# Altium PCB Alt_BRD_UPS_3_3V.PcbDoc
Units mm, origin at the board's own origin, x right, y up, seen from the top; angles counter-clockwise.
Board outline 13.97 x 16.51 mm, 2 copper layers (Top Layer, Bottom Layer); 26 components, 14 nets, 66 pads, 10 vias.
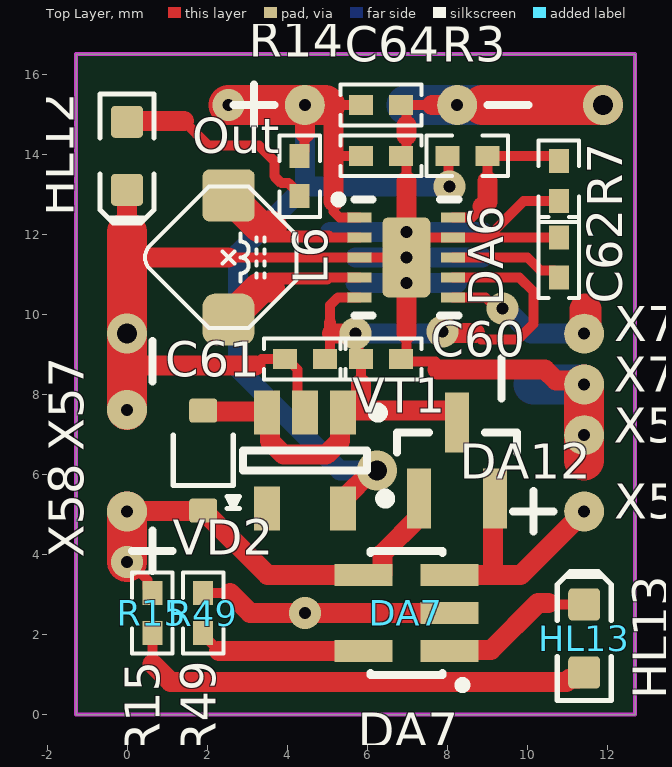
[diagram p0: Top Layer view]
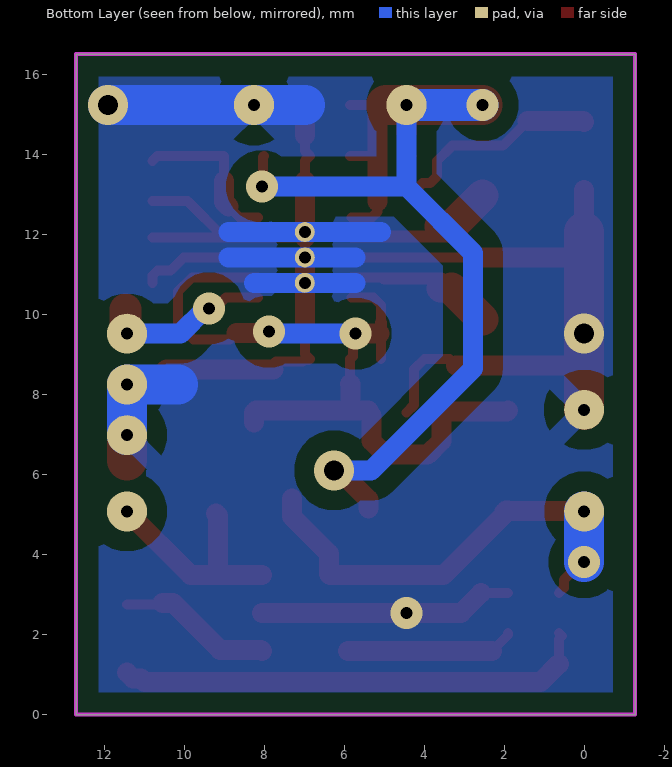
[diagram p1: Bottom Layer view, seen from below]
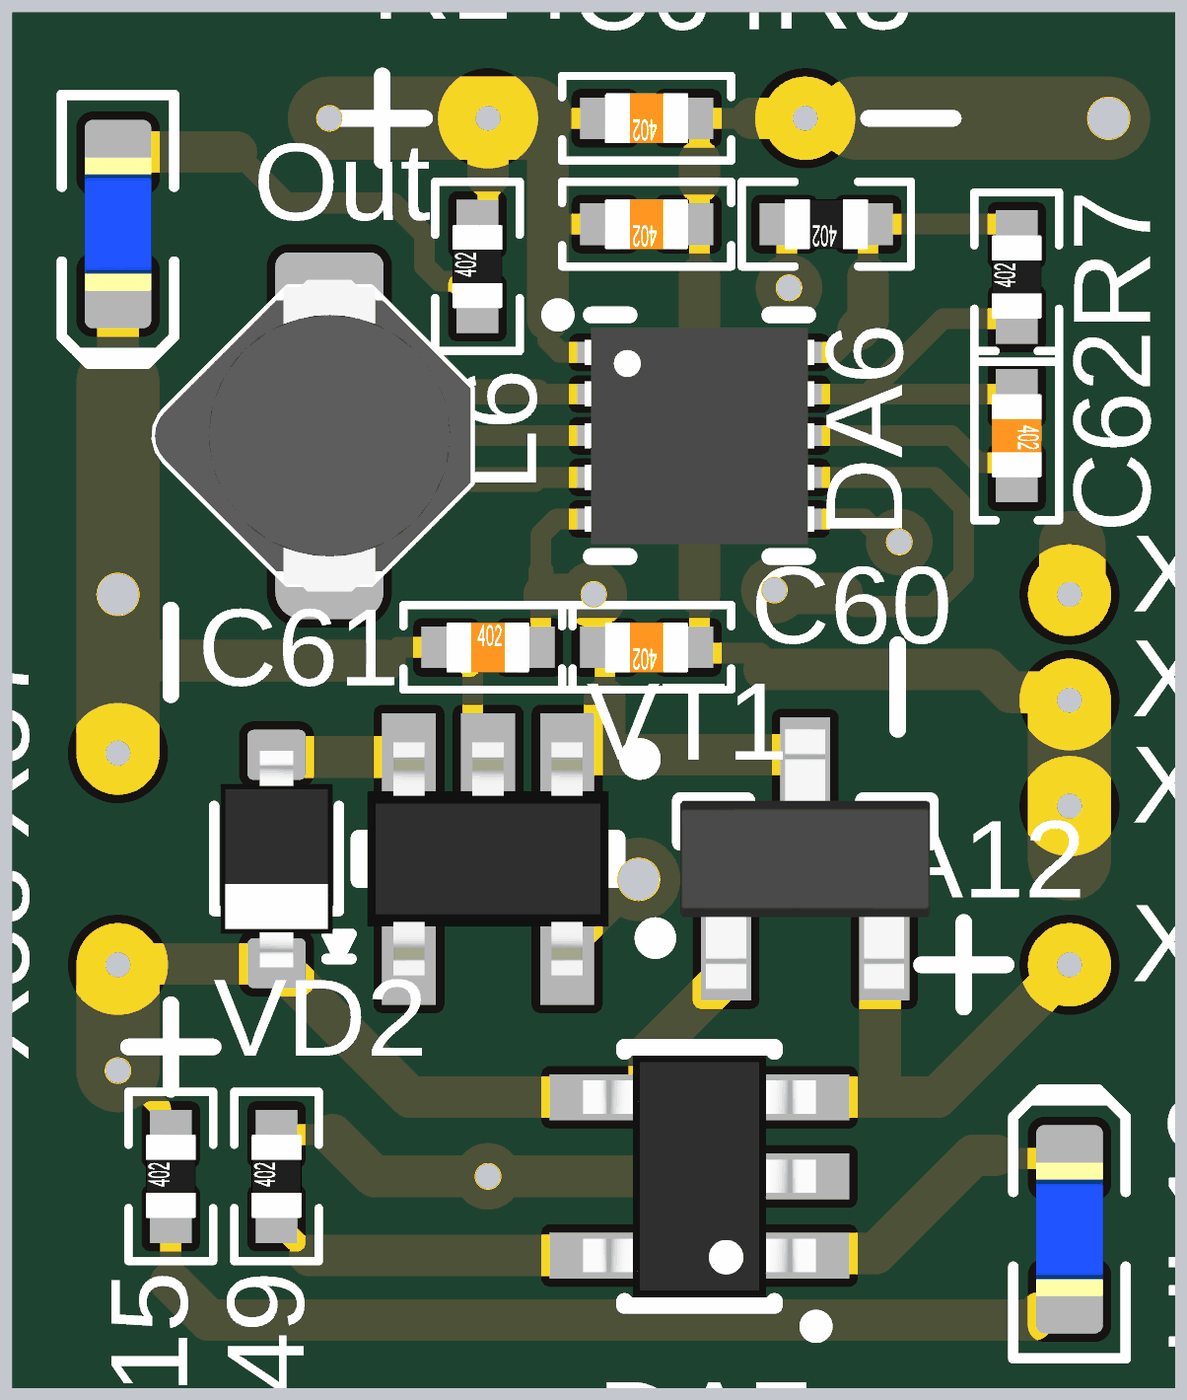
[diagram p2: 3D render of the assembled board from above, using the file's embedded part models]

## Layer stack, top to bottom
Top Solder: solder mask 0.0102, Solder Resist, Dk 3.5
Top Layer: signal copper 0.0356
Dielectric 1: dielectric 0.32, FR-4, Dk 4.8
Bottom Layer: signal copper 0.0356
Bottom Solder: solder mask 0.0102, Solder Resist, Dk 3.5

## Board outline
-1.27,0 -1.27,16.51 12.7,16.51 12.7,0

## Design rules (kind name [scope] priority, off if disabled: settings)
Clearance Clearance_InPoly [InPoly] p1: gap=0.5 ignorepadtopadclearanceinfootprint=FALSE except(0: Arc-Hole Track-Hole SMDPad-Hole THPad-Hole Via-Hole Fill-Hole Poly-Hole Region-Hole Text-Hole)
Clearance [All] p2: gap=0.25 ignorepadtopadclearanceinfootprint=TRUE except(0: Arc-Hole Track-Hole SMDPad-Hole THPad-Hole Via-Hole Fill-Hole Poly-Hole Region-Hole Text-Hole)
Height [All] p1: minheight=0 maxheight=100 prefheight=12.7
PolygonConnect [All] p1: thpad.connectstyle=Relief thpad.reliefconductorwidth=0.5 thpad.reliefentries=4 thpad.polygonreliefangle="45 Angle" thpad.airgapwidth=0.5 smdpad.connectstyle=Relief smdpad.reliefconductorwidth=0.5 smdpad.reliefentries=4 smdpad.polygonreliefangle="90 Angle" smdpad.airgapwidth=0.5 via.connectstyle=Direct via.reliefconductorwidth=0.254 via.reliefentries=4 via.polygonreliefangle="90 Angle" via.airgapwidth=0.254
RoutingVias [All] p1: holewidth=0.5 width=1 viastyle="Through Hole" minholewidth=0.3 minwidth=0.6 maxholewidth=0.8 maxwidth=1.2
SolderMaskExpansion SolderMaskExpansion_IsVia [IsVia] p1: expansion=0.102 istentingtop=TRUE
SolderMaskExpansion [All] p2: expansion=0.102 istentingtop=FALSE
Width [All] p1: maxlimit=2 minlimit=0.25 preferedwidth=0.5
29 further rules are at their usual default settings.

## Components (designator, comment, footprint, x,y, rotation, side; value= is the part's Value field where it differs from the comment)
C60 "47uF 6.3V" CapKemet1005(0402) 6.35,8.89 r180 top
C61 "100n 16V" CapKemet1005(0402) 4.445,8.89 r0 top
C62 "100n 16V" CapKemet1005(0402) 10.795,11.43 r270 top
C63 "100n 16V" CapKemet1005(0402) 6.35,15.24 r180 top
C64 "47uF 6.3V" CapKemet1005(0402) 6.35,13.97 r180 top
DA6 "TPS63031DSKT" WSON-10 6.985,11.43 r0 top
DA7 "MCP73832T-2DFI/OT" SOT-23-5 6.985,2.54 r90 top
DA12 "MIC5317-3.3YM5-TR" SOT-23-OT5_N 4.445,6.35 r270 top
HL12 "Bl 0603" LED-0603-BLUE 0,13.97 r270 top
HL13 "Bl 0603" LED-0603-BLUE 11.43,1.905 r90 top
L6 "2.2UH 1.3" CDRH2D11 2.54,11.43 r0 top
R3 "?" "REZKemet 0402" 8.509,13.97 r180 top
R7 "?" "REZKemet 0402" 10.795,13.335 r90 top
R14 "620" "REZKemet 0402" 4.318,13.462 r90 top
R15 "620" "REZKemet 0402" 0.635,2.54 r90 top
R49 "5.1k" "REZKemet 0402" 1.905,2.54 r90 top
VD2 "1N4148WSTR" SOD323 1.905,6.35 r90 top
VT1 "IRLML6401PbF" SOT23-3N 8.255,6.35 r90 top
X56 "PLLS1.27-1-R" PLLS1.27-1-R 11.43,5.08 r90 top
X57 "PLLS1.27-1-R" PLLS1.27-1-R 0,7.62 r90 top
X58 "PLLS1.27-1-R" PLLS1.27-1-R 0,5.08 r90 top
X59 "PLLS1.27-1-R" PLLS1.27-1-R 11.43,6.985 r90 top
X60 "PLLS1.27-1-R" PLLS1.27-1-R 4.445,15.24 r90 top
X61 "PLLS1.27-1-R" PLLS1.27-1-R 8.255,15.24 r90 top
X74 "PLLS1.27-1-R" PLLS1.27-1-R 11.43,9.525 r90 top
X75 "PLLS1.27-1-R" PLLS1.27-1-R 11.43,8.255 r90 top

## Footprints (in the part's own frame and the unit in brackets; to place one, negate y for a bottom-side part, rotate by r counter-clockwise, add the part's x,y. Pads: shape width x height; smd on the part's side, far side on the other; paste and mask are expansions set on the pad)
CapKemet1005(0402) [mm] "Chip Capacitor, Body 1.0x0.5mm, IPC High Density"
  rect 0.6x0.5 smd: 1(-0.5,0) 2(0.5,0)
  silkscreen extent -1.02,-0.51 1.02,0.51, body extent -0.5,-0.3 0.5,0.3, height 0.2
CDRH2D11 [mm]
  rrect25% 1.3x1.3 smd: 1(0,1.55)
  rrect50% 1.3x1.3 smd: 2(0,-1.55)
  silkscreen extent -2.09,-1.77 1.7,1.77, body extent -2.33,-2.33 2.33,2.33, height 1.1
LED-0603-BLUE [mm]
  round 0.254 on Mech15: 0(0,0)
  rrect25% 0.8x0.8 smd: A(-0.85,0) K(0.85,0)
  Top Layer pour cut-out: -0.5,0.5 0.5,0.5 0.5,-0.5 -0.5,-0.5
  silkscreen extent -1.55,-0.67 1.68,0.67, body extent -0.8,-0.4 0.8,0.4, height 0.75
PLLS1.27-1-R [mm]
  round 1 hole 0.3: 1(0,0)
"REZKemet 0402" [mm] "Chip Capacitor, Body 1.0x0.5mm, IPC High Density"
  rect 0.6x0.5 smd: 1(-0.5,0) 2(0.5,0)
  silkscreen extent -1.02,-0.51 1.02,0.51, body extent -0.5,-0.3 0.5,0.3, height 0.2
SOD323 [mm] "SOD-323; 2 Leads; Body 1.8 x 1.35 mm, (LxW)"
  round 0.508 on Mech15: 0(0,0)
  rrect25% 0.6x0.7 smd: 1(-1.25,0) 2(1.25,0)
  silkscreen extent -1.2,-0.9 0.64,0.75, body extent -1.3,-0.68 1.3,0.68, height 1.1
SOT23-3N [mm] "SOT23, 3-Leads, Body 2.9x1.3mm, Pitch 0.95mm, Lead Span 2.5mm, IPC Medium Density"
  rect 1.5x0.6 smd: 1(-0.95,0.95) 2(-0.95,-0.95) 3(0.95,0)
  silkscreen extent -1.07,-1.5 0.7,1.92, body extent -1.57,-1.5 1.57,1.5, height 1
SOT-23-5 [mm] "SOT-23/SC-74A; 5 Leads; Body 3 x 3.1 mm, inc. leads (LxW max)"
  rect 0.55x1.45 smd: 1(-0.95,-1.075) 2(0,-1.075) 3(0.95,-1.075) 4(0.95,1.075) 5(-0.95,1.075)
  silkscreen extent -1.9,-1.5 1.55,0.9, body extent -1.45,-1.4 1.45,1.4, height 1.45
SOT-23-OT5_N [mm] "SOT23, 5-Leads, Body 2.9x1.6mm, Pitch 0.95mm, Lead Span 2.7mm, IPC Medium Density"
  rect 1.1x0.65 smd: 1(-1.2,0.95) 2(-1.2,0) 3(-1.2,-0.95) 4(1.2,-0.95) 5(1.2,0.95)
  silkscreen extent -1.32,-1.55 0.25,1.95, body extent -1.4,-1.45 1.4,1.45, height 0.95
WSON-10 [mm] "SON, 10-Leads, Body 2,50x2,50mm,"
  rect 0.6x0.25 smd: 1(-1.17,1) 2(-1.17,0.5) 3(-1.17,0) 4(-1.17,-0.5) 5(-1.17,-1) 6(1.17,-1) 7(1.17,-0.5) 8(1.17,0) 9(1.17,0.5) 10(1.17,1)
  round 0.5 hole 0.3: 11(0,-0.635) 11(0,0) 11(0,0.635)
  rrect25% 1.2x2 smd: 11(0,0)
  silkscreen extent -1.8,-1.45 1.3,1.55, body extent -1.38,-1.3 1.38,1.3, height 0.8

## Part data
C60 C64: library part GRM188R60J476ME15D, "CAP CER 47UF 6.3V X5R 0603", Digi-Key Part Number=490-13247-1-ND, Package=0603, HelpURL=https://www.digikey.com/en/products/detail/murata-electronics/GRM188R60J476ME15D/5877410, Manufacturer Part Number=GRM188R60J476ME15D, Part Number=GRM188R60J476ME15D, Price$=0.16924
C61 C62 C63: library part CL05F104ZO5NNNC, "Cap Cer 0.1uF 16V 1% C0G(NP0) MLCC", Digi-Key Part Number=1276-1004-1-ND, Package=0402, HelpURL=https://www.digikey.com/product-detail/en/CL05F104ZO5NNNC/1276-1004-1-ND/3889090/?itemSeq=332907103, Manufacturer Part Number=CL05F104ZO5NNNC, Part Number=CL05F104ZO5NNNC, Price$=0.00475
DA6: "IC REG BCK BST 3.3V 900MA 10SON", Digi-Key Part Number=296-23904-1-ND, HelpURL=https://www.digikey.com/en/products/detail/texas-instruments/TPS63031DSKT/1967863, Manufacturer Part Number=TPS63031DSKT, Part Number=TPS63031DSKT, Price$=2,28
DA7: "IC LI-ION/LI-POLY CTRLR SOT23-5", Digi-Key Part Number=MCP73832T-2DFI/OTCT-ND, HelpURL=https://www.digikey.com/product-detail/en/MCP73832T-2DFI%2fOT/MCP73832T-2DFI%2fOTCT-ND/2060344/?itemSeq=274027917, Part Number=MCP73832T-2DFI/OT
DA12: "Linear Voltage Regulator IC 1 Output 150mA SOT-23-5", Digi-Key Part Number=MIC5317-3.3YM5-CT-ND, HelpURL=https://www.digikey.com/product-detail/en/microchip-technology/MIC5317-3.3YM5-TR/MIC5317-3.3YM5-CT-ND/7671939, Manufacturer Part Number=MIC5317-3.3YM5-TR, Part Number=MIC5317-3.3YM5-TR, Price$=0,16
HL12 HL13: library part 150060BS55040, "LED BLUE DIFFUSED 0603 SMD", Digi-Key Part Number=732-12013-1-ND, Package=0603, HelpURL=https://www.digikey.com/products/en?keywords=732-12013-1-ND, Manufacturer Part Number=150060BS55040, Part Number=150060BS55040
L6: library part CDRH2D11/HPNP-2R2NC, "FIXED IND 2.2UH 1.3A 120 MOHM", Digi-Key Part Number=308-1578-1-ND, HelpURL=https://www.digikey.com/product-detail/en/sumida-america-components-inc/CDRH2D11-HPNP-2R2NC/308-1578-1-ND/2620850, LatestRevisionDate=17-Jul-2002, LatestRevisionNote="Re-released for DXP Platform.", Manufacturer Part Number=CDRH2D11/HPNP-2R2NC, PackageDescription="Axial Device, Thru-Hole; 2 Leads; 0.9 in Pin Spacing", PackageReference=AXIAL-0.9, Part Number=CDRH2D11/HPNP-2R2NC, Price$=0.69, Published=24-Mar-1999, Publisher="Altium Limited"
R3 R7 R14 R15: library part RESC1005(0402), Package=0402, Part Number=RESC1005(0402)
R49: library part RESC1005(0402), "RES SMD 5.1K OHM 1% 1/10W 0402", Manufacturer Part Number=ERJ-2RKF5101X, Mouser Part Number=755-SFR01MZPF5101, Package=0402, HelpURL=https://eu.mouser.com/ProductDetail/ROHM-Semiconductor/SFR01MZPF5101?qs=sGAEpiMZZMvdGkrng054t7z4BkURc4Lz8VVRSaz2ejIiXEQeYNXBXw%3D%3D, Part Number=RESC1005(0402), Price$=0.1
VD2: "DIODE GEN PURP 75V 300MA SOD323", Digi-Key Part Number=1655-1359-1-ND, Manufacturer Part Number=?, Code_JEDEC=DO-204-AH, ComponentLink1Description="Manufacturer Link", ComponentLink1URL=http://www.fairchildsemi.com/, ComponentLink2Description=Datasheet, ComponentLink2URL=http://www.fairchildsemi.com/ds/1N%2F1N4148.pdf, DatasheetVersion=1997, HelpURL=https://www.digikey.com/product-detail/en/smc-diode-solutions/1N4148WSTR/1655-1359-1-ND/6022804, LatestRevisionDate=17-Jul-2002, LatestRevisionNote="Re-released for DXP Platform.", Note=?, Package=?, PackageDescription="Diode, Axial; Body 3.8 x 1.9 mm (LxDia. max), Lead Dia. 0.53 mm (max)", PackageReference=DO-35, Part Number=1N4148WSTR, Price$=?, Published=8-Jun-2000, Publisher="Altium Limited"
VT1: Digi-Key Part Number=???, HelpURL=https://www.infineon.com/dgdl/irlml6401pbf.pdf?fileId=5546d462533600a401535668b96d2634, Manufacturer Part Number=???, Note=???, Package=???, Part Number=IRLML6401PbF, Price$=???
X56 X57 X58 X59 X60 X61 X74 X75: Part Number=PLLS1.27-1-R

## Via types
v1: diameter 0.8, hole 0.3, Top Layer to Bottom Layer, tented both sides, 7 vias
v2: diameter 1, hole 0.5, Top Layer to Bottom Layer, tented both sides, 3 vias

## Nets (pads, with @x,y where several pads share a name; then routed paths per layer and width w, separated by ;. In a path a pad name is that pad's centre, name@x,y a point inside that pad or via, vN(x,y) a via of type N, cw(c..) or ccw(c..) an arc to the next point about the centre after c; other vN are vias at no path point)
+5V: DA7.4 R15.2 VD2.1 VT1.1 X58.1 | length 13
  Top Layer w0.25: v1@0.065,3.81 0.51,3.365 0.51,3.165 R15.2
  Top Layer w0.5: X58.1 0.01,5.09 1.92,5.09 VD2.1@1.93,5.1 ; VT1.1 7.305,4.95 6.385,4.03 6.385,3.515 6.36,3.49 DA7.4 3.515,3.49 2.005,5 2.005,5.05 VD2.1@1.955,5.1 ; VD2.1@1.955,5.1 VD2.1 VD2.1@1.955,5.1
  Top Layer w1: v1(0,3.81) X58.1
  Bottom Layer w1: v1(0,3.81) X58.1
Bat: DA7.3 VT1.2 X56.1 | length 5.6
  Top Layer w0.5: DA7.3 8.51,3.49 9.155,3.49 ; VT1.2@9.205,5.03 9.155,4.98 9.155,3.49 ; X56.1 9.84,3.49 9.155,3.49
GND: C60.1 C61.1 C62.1 C63.1 C64.1 DA6.3 DA6.9 DA6.11 DA7.2 DA12.2 HL12.K R7.1 R49.2 X57.1 X59.1 X61.1 X75.1 | length 65.6
  Top Layer w0.25: R49.2 2.579,3.04 ; 2.54,11.43 DA6.3 6.985,11.43 6.985,11.93 DA6.9 9.009,11.93 ; 3.207,8.73 3.367,8.89 C61.1 ; C61.1@3.995,8.89 4.26,8.625 4.26,7.735 DA12.2 ; C60.1 6.878,8.862 6.985,8.862 7.025,8.822 7.71,8.822 7.782,8.75 ; C64.1 C64.1@6.86,13.97 ; C63.1 6.985,15.24 7.62,15.24 ; C60.1@6.86,8.89 6.909,8.939 6.985,9.015 6.985,9.525 ; 6.985,13.335 6.985,13.845 C64.1@6.86,13.97 ; 6.985,14.478 6.985,14.095 C64.1@6.86,13.97 ; 6.985,14.732 C63.1@6.985,15.115 ; C62.1 9.009,11.93 ; R7.1 9.914,12.835 9.009,11.93
  Top Layer w0.5: 0,8.89 0.081,8.89 0.241,8.73 3.207,8.73 ; 0,11.43 2.54,11.43 ; 0,12.065 HL12.K ; 2.579,3.04 3.079,2.54 v1(4.445,2.54) 5.845,2.54 DA7.2 ; 6.985,9.525 6.985,10.795 DA6.11@6.985,11.43 ; DA6.11@6.985,11.93 6.985,12.065 6.985,13.335 ; 6.985,14.478 6.985,14.732 ; 7.62,15.24 X61.1 8.89,15.24 ; 7.763,8.624 10.449,8.624 10.722,8.351 11.334,8.351 X75.1
  Top Layer w1: X57.1 0,8.89 v2(0,9.525) 0,11.43 0,12.065 ; 8.89,15.24 v2(11.9,15.24) ; 11.43,6.35 X59.1 X75.1
  Bottom Layer w0.5: 5.08,12.065 6.985,12.065 8.89,12.065 ; 5.715,10.795 6.985,10.795 8.255,10.795 ; 5.715,11.43 6.985,11.43 8.89,11.43
  Bottom Layer w1: 6.985,15.24 X61.1 v2(11.9,15.24) ; 10.16,8.255 X75.1 X59.1
NetC60_2: C60.2 C61.2 DA6.5 DA6.7 DA12.1 DA12.3 VD2.2 VT1.3 | length 20.6
  Top Layer w0.25: C61.2@5.08,8.89 5.08,9.525 ; 5.08,9.805 5.08,10.24 5.27,10.43 DA6.5 ; v1(5.715,9.525) 5.782,9.458 5.782,8.958 C60.2 5.85,8.27 ; DA6.7 8.826,10.93 9.806,10.93 10.16,10.576 10.16,9.77 9.77,9.38 8.854,9.38 8.744,9.49
  Top Layer w0.3: 5.08,9.525 5.08,9.805
  Top Layer w0.5: VD2.2 1.93,7.575 3.47,7.575 DA12.3 3.57,7.475 3.57,6.843 3.913,6.5 4.977,6.5 5.32,6.843 5.32,7.475 DA12.1 5.395,7.6 5.845,7.6 ; 5.119,9.525 v1(5.715,9.525) ; 5.85,8.27 5.845,8.265 5.845,7.6 ; v1(7.885,9.577) 7.926,9.536 8.698,9.536 ; VT1.3 8.255,7.55 8.205,7.6 5.845,7.6
  Bottom Layer w0.5: v1(5.715,9.525) 7.833,9.525 v1(7.885,9.577)
NetC62_2: C62.2 DA6.8 | length 3
  Top Layer w0.25: DA6.8 10.013,11.43 10.338,11.105 10.67,11.105 10.795,10.98 C62.2@10.795,10.795
NetC63_2: C63.2 C64.2 DA6.1 DA12.5 R3.2 R14.2 X60.1 | length 28.1
  Top Layer w0.25: R14.2 4.443,14.087 4.443,14.535 4.445,14.538 ; 4.953,15.24 C63.2 ; 5.164,12.827 5.164,12.576 5.31,12.43 DA6.1 ; 5.164,13.97 C64.2 ; R3.2 8.035,13.944 8.035,13.231 v1(8.06,13.205)
  Top Layer w0.5: 4.445,14.538 X60.1 ; 4.953,15.24 5.164,15.029 5.164,13.97 5.164,12.827 ; DA12.5 5.395,5.375 6.125,6.105 v2(6.255,6.105) v2@6.35,6.2
  Top Layer w1: v1(2.54,15.24) X60.1 4.953,15.24
  Bottom Layer w0.5: X60.1 4.445,13.205 ; v2(6.255,6.105) 5.325,6.105 2.777,8.653 2.777,11.537 4.445,13.205 ; v1@7.718,13.205 6.35,13.205 4.445,13.205
  Bottom Layer w0.8: v1(2.54,15.24) X60.1
NetDA6_2: DA6.2 L6.1 | length 3.6
  Top Layer w0.25: 5.043,11.93 DA6.2
  Top Layer w0.3: 3.565,11.955 5.043,11.955
  Top Layer w0.8: L6.1 3.315,12.205 3.596,12.205
NetDA6_4: DA6.4 L6.2 | length 3.6
  Top Layer w0.25: 5.003,10.93 DA6.4
  Top Layer w0.3: 3.565,10.905 5.003,10.905
  Top Layer w0.7: 3.315,10.655 3.596,10.655
  Top Layer w0.8: L6.2 3.315,10.655
NetDA6_6: DA6.6 X74.1 | length 4.3
  Top Layer w0.25: DA6.6 8.961,10.43 9.236,10.155 v1(9.385,10.155)
  Top Layer w0.8: X74.1 11.462,9.557 11.462,10.128
  Bottom Layer w0.5: v1(9.385,10.155) 9.466,10.155 10.096,9.525 X74.1
NetDA6_10: DA6.10 R3.1 R7.2 | length 4
  Top Layer w0.25: DA6.10 8.62,12.43 8.89,12.7 ; 9.009,13.335 R3.1 10.67,13.97 10.795,13.845 R7.2
  Top Layer w0.5: 8.89,12.7 9.009,12.819 9.009,13.335
NetDA7_1: DA7.1 HL13.K | length 3.9
  Top Layer w0.25: 10.541,2.755 HL13.K
  Top Layer w0.5: DA7.1 8.085,1.615 9.101,1.615 10.28,2.794 10.541,2.794
NetDA7_5: DA7.5 R49.1 | length 4.2
  Top Layer w0.25: R49.1 1.905,1.99 2.305,1.59
  Top Layer w0.5: 2.305,1.59 DA7.5
NetHL12_A: HL12.A R14.1 | length 5.4
  Top Layer w0.25: 1.421,14.835 2.032,14.224 3.302,14.224 3.683,13.843 3.683,13.462 3.858,13.287 4.043,13.287 4.318,13.012 R14.1
  Top Layer w0.5: HL12.A 0.015,14.835 1.421,14.835
NetHL13_A: HL13.A R15.1 | length 11.9
  Top Layer w0.25: 0.635,1.27 0.635,1.894 0.562,1.967 R15.1
  Top Layer w0.5: 0.635,1.27 1.09,0.815 10.987,0.815 11.077,0.905 11.28,0.905 HL13.A
pads on no net: DA12.4 HL12.0 HL13.0 VD2.0

## Polygon pours and split planes (outlines as drawn)
GND on Bottom Layer "GND_L02_P000" (solid, remove dead copper, pour order 0): -1.27,16.51 12.7,16.51 12.7,0 -1.27,0

## Keep-outs
Keep-Out Layer:
  the board outline again, w0.1

## Silkscreen, mask and mechanical layers (free items; w line width, h text height)
Top Overlay:
  lines w0.2: 0.127,4.094 1.143,4.094 ; 0.635,3.586 0.635,4.602 ; 0.635,8.322 0.635,9.338 ; 2.667,15.24 3.683,15.24 ; 3.175,14.732 3.175,15.748 ; 9.017,15.24 10.033,15.24 ; 9.366,7.906 9.366,8.922 ; 9.652,5.08 10.668,5.08 ; 10.16,4.572 10.16,5.588
  text "Out" at 1.625,13.744 h1.5